# Altium PCB PCB_6位IN12-辉光管时钟_2_2024-12-10.pcbdoc (part 1 of 2)
Units mm, origin at the board's own origin, x right, y up, seen from the top; angles counter-clockwise.
Board outline 250.51 x 113.84 mm, 2 copper layers (Top Layer, Bottom Layer); 109 components, 183 nets, 545 pads, 291 vias.
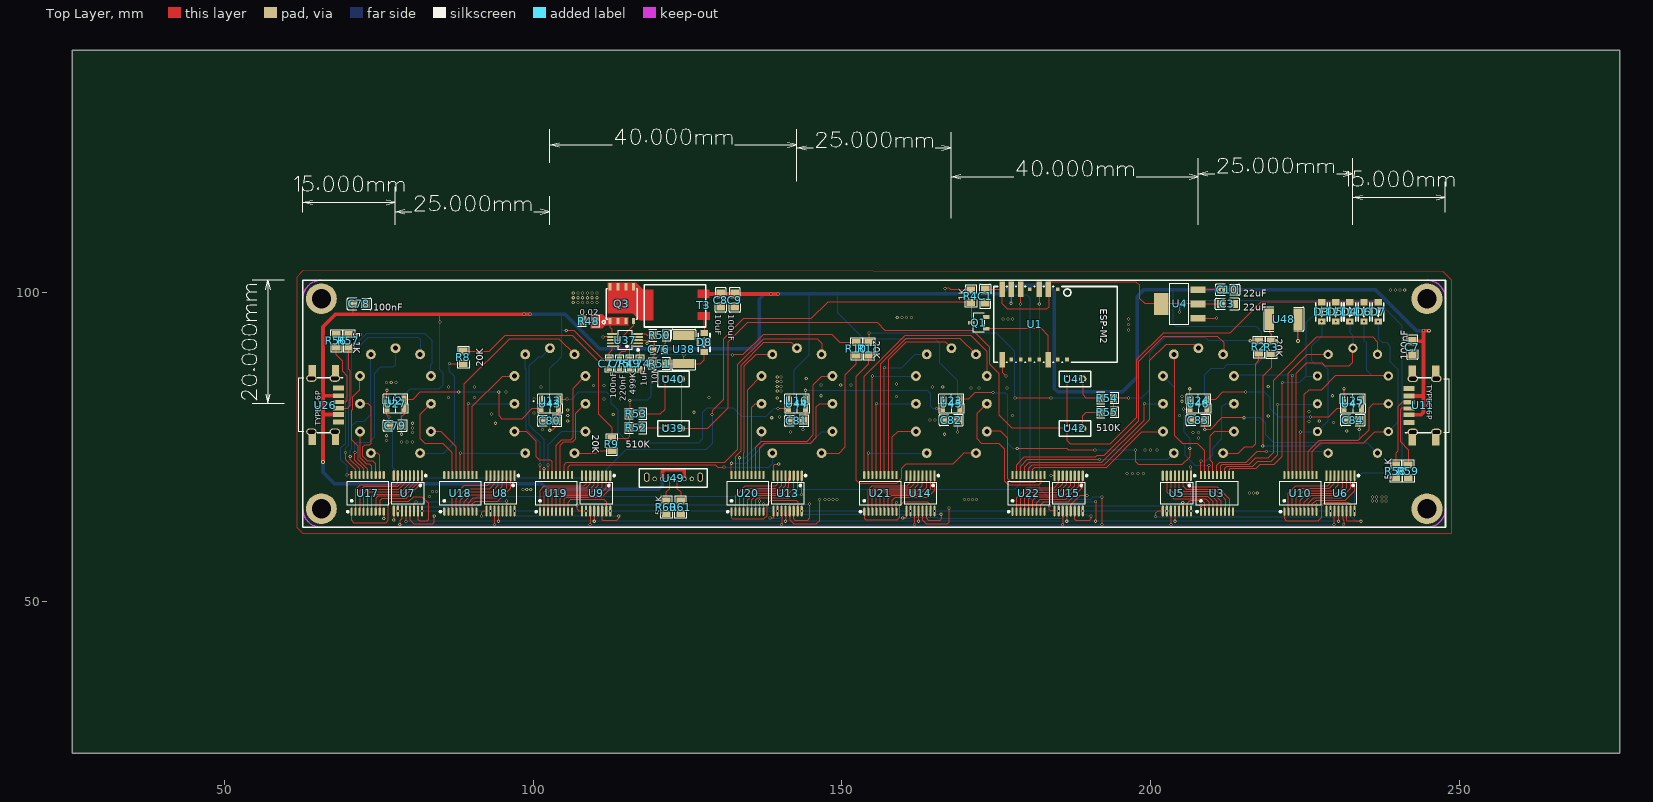
[diagram p0: Top Layer view]
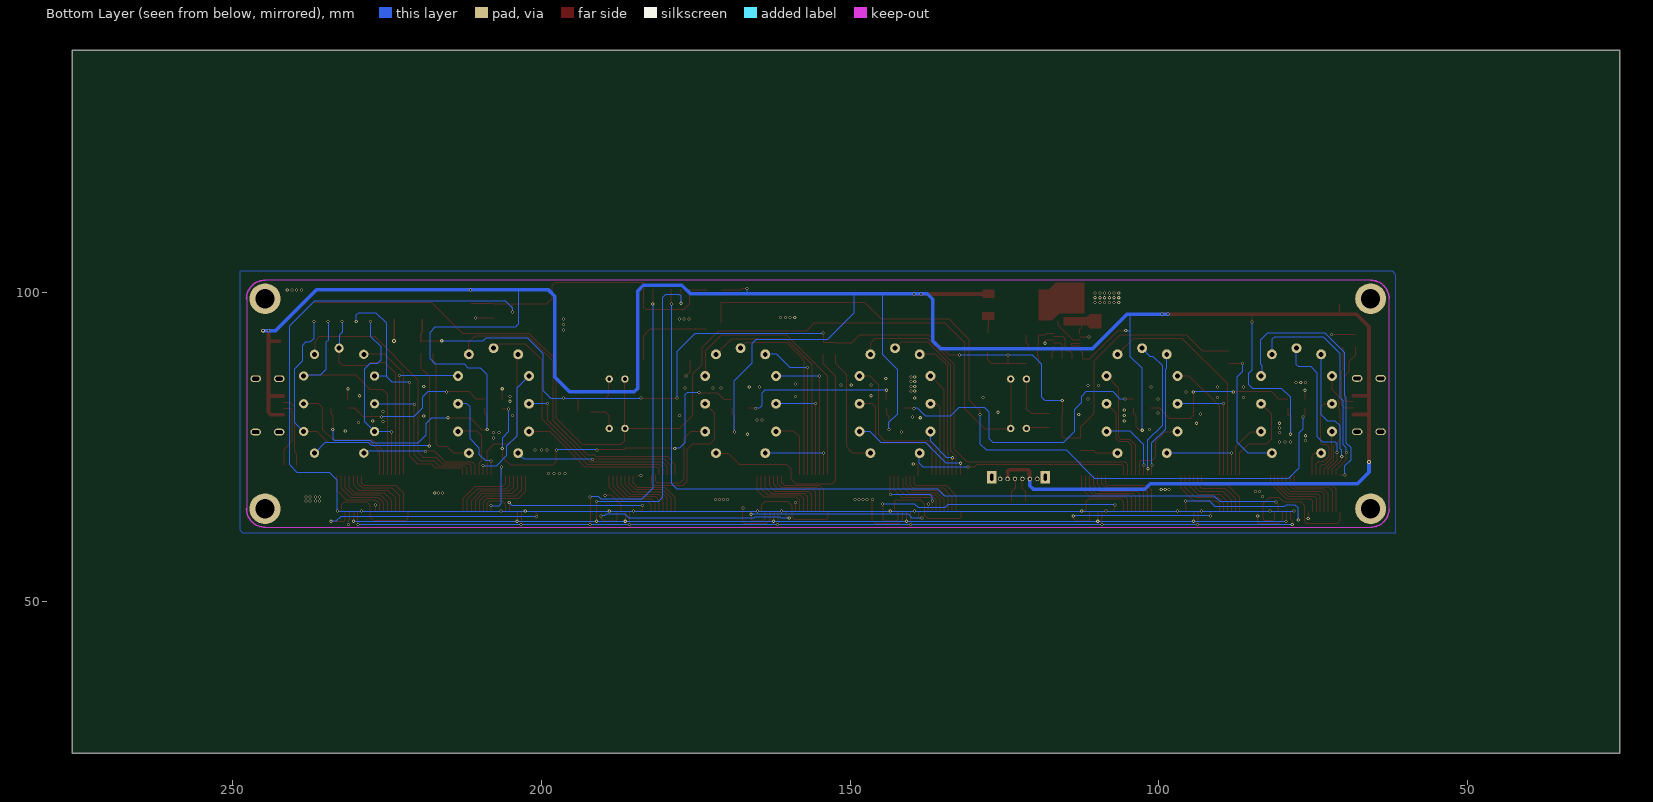
[diagram p1: Bottom Layer view, seen from below]

## Layer stack, top to bottom
Top Layer: signal copper (thickness not stored)
Dielectric: dielectric 0.32, FR-4, Dk 4.8
Bottom Layer: signal copper (thickness not stored)

## Board outline
275.912,25.4 25.4,25.4 25.4,139.235 275.912,139.235

## Components (designator, comment, footprint, x,y, rotation, side; value= is the part's Value field where it differs from the comment)
C1 "100nF" C0805 173.175,99.439 r270 top
C3 "22uF" C0805 212.418,98.169 r0 top
C7 "100nF" C0805 242.358,91.153 r90 top
C8 "10uF" C0805 130.376,98.804 r90 top
C9 "100uF" C0805 132.662,98.804 r90 top
C10 "22uF" C0805 212.418,100.455 r180 top
C74 "1uF" R0603 117.295,88.517 r90 top
C75 "220nF" R0603 113.993,88.517 r90 top
C76 "10nF" R0603 120.343,90.803 r180 top
C77 "100nF" R0603 112.342,88.517 r90 top
C78 "100nF" C0805 71.829,98.169 r180 top
C79 "100nF" C0805 77.671,78.484 r0 top
C80 "100nF" C0805 102.69,79.246 r0 top
C81 "100nF" C0805 142.695,79.246 r0 top
C82 "100nF" C0805 167.714,79.373 r0 top
C83 "100nF" C0805 207.719,79.373 r0 top
C84 "100nF" C0805 232.738,79.373 r0 top
D3 "ES1JW" SOD-123F_L2.8-W1.8-LS3.7-RD 227.658,96.899 r270 top
D4 "ES1JW" SOD-123F_L2.8-W1.8-LS3.7-RD 232.23,96.899 r270 top
D5 "ES1JW" SOD-123F_L2.8-W1.8-LS3.7-RD 229.944,96.899 r270 top
D6 "ES1JW" SOD-123F_L2.8-W1.8-LS3.7-RD 234.516,96.899 r270 top
D7 "ES1JW" SOD-123F_L2.8-W1.8-LS3.7-RD 236.802,96.899 r270 top
D8 "ES1JW" SOD-123F_L2.8-W1.8-LS3.7-RD 127.709,91.946 r270 top
Q1 "WSTBSS138" SOT-23-3_L2.9-W1.6-P1.90-LS2.8-BR 172.159,95.121 r0 top
Q3 "TPH1R403NL" DSOP-8_L5.0-W5.0-P1.27-LS6.0-BL-EP 114.374,98.169 r0 top
R2 "20K" R0805#1 217.498,91.218 r270 top
R3 "20K" R0805#1 219.53,91.184 r270 top
R4 "1K" R0805#1 170.889,99.439 r90 top
R8 "20K" R0805#1 88.716,89.52 r90 top
R9 "20K" R0805#1 112.723,75.436 r270 top
R10 "20K" R0805#1 152.347,90.93 r270 top
R11 "20K" R0805#1 154.379,90.93 r270 top
R48 "0.02" R0805#2 109.04,95.375 r0 top
R49 "499K" R0603 115.644,88.517 r90 top
R50 "75K" R0805#2 120.47,93.089 r180 top
R51 "10M" R0805#1 120.47,88.517 r0 top
R52 "510K" R0805#1 116.66,78.103 r0 top
R53 "510K" R0805#1 116.66,80.389 r0 top
R54 "510K" R0805#1 192.987,82.929 r180 top
R55 "510K" R0805#1 192.987,80.643 r180 top
R56 "18k" R0805#1 68.146,92.2 r270 top
R57 "5.1K" R0805#1 70.178,92.2 r270 top
R58 "18k" R0805#1 239.691,71.087 r90 top
R59 "5.1K" R0805#1 241.723,71.087 r90 top
R60 "5.1K" R0805#1 121.581,65.245 r90 top
R61 "18k" R0805#1 123.867,65.245 r90 top
T3 "TTRN-060-054" TTRN-060-054 122.883,97.915 r90 top
U1 "ESP-M2" WIFIMODULE-ESP-M2 181.176,94.867 r270 top
U2 "in12" IN12#1 77.716,82.02 r0 top
U3 "TD62083AFNG" SSOP-18_L6.8-W4.4-P0.65-LS6.4-BL 210.716,67.521 r0 top
U4 "AMS1117" SOT-223-3_L6.5-W3.4-P2.30-LS7.0-BR 204.671,98.169 r0 top
U5 "74HCT595PW,112" TSSOP-16_L5.0-W4.4-P0.65-LS6.4-BL 204.216,67.521 r180 top
U6 "74HCT595PW,112" TSSOP-16_L5.0-W4.4-P0.65-LS6.4-BL 230.716,67.521 r180 top
U7 "74HCT595PW,112" TSSOP-16_L5.0-W4.4-P0.65-LS6.4-BL 79.716,67.522 r180 top
U8 "74HCT595PW,112" TSSOP-16_L5.0-W4.4-P0.65-LS6.4-BL 94.716,67.521 r180 top
U9 "74HCT595PW,112" TSSOP-16_L5.0-W4.4-P0.65-LS6.4-BL 110.216,67.521 r180 top
U10 "TD62083AFNG" SSOP-18_L6.8-W4.4-P0.65-LS6.4-BL 224.216,67.521 r0 top
U11 "TYPEC 6P" "TYPEC 6P" 244.216,81.52 r270 top
U12 "in12" IN12#1 102.716,82.02 r0 top
U13 "74HCT595PW,112" TSSOP-16_L5.0-W4.4-P0.65-LS6.4-BL 141.216,67.521 r180 top
U14 "74HCT595PW,112" TSSOP-16_L5.0-W4.4-P0.65-LS6.4-BL 162.716,67.521 r180 top
U15 "74HCT595PW,112" TSSOP-16_L5.0-W4.4-P0.65-LS6.4-BL 186.716,67.521 r180 top
U16 "in12" IN12#1 142.716,82.02 r0 top
U17 "TD62083AFNG" SSOP-18_L6.8-W4.4-P0.65-LS6.4-BL 73.216,67.522 r0 top
U18 "TD62083AFNG" SSOP-18_L6.8-W4.4-P0.65-LS6.4-BL 88.216,67.521 r0 top
U19 "TD62083AFNG" SSOP-18_L6.8-W4.4-P0.65-LS6.4-BL 103.716,67.521 r0 top
U20 "TD62083AFNG" SSOP-18_L6.8-W4.4-P0.65-LS6.4-BL 134.716,67.521 r0 top
U21 "TD62083AFNG" SSOP-18_L6.8-W4.4-P0.65-LS6.4-BL 156.216,67.521 r0 top
U22 "TD62083AFNG" SSOP-18_L6.8-W4.4-P0.65-LS6.4-BL 180.216,67.521 r0 top
U23 "in12" IN12#1 167.716,82.02 r0 top
U24 "in12" IN12#1 207.716,82.02 r0 top
U25 "in12" IN12#2 232.716,82.02 r0 top
U26 "TYPEC 6P" "TYPEC 6P" 66.114,82.04 r90 top
U27 "WS2812--1209" WS2812--1209 77.716,82.02 r180 top
U37 "MAX668EUB+" MSOP-10_L3.0-W3.0-P0.50-LS5.0-BL 114.882,92.327 r90 top
U38 "1uf" C1812 124.407,90.803 r270 top
U39 "HDR-TH_2P-P2.54_C9900022687" HDR-TH_2P-P2.54_C9900022687 122.716,78.02 r0 top
U40 "HDR-TH_2P-P2.54_C9900022687" HDR-TH_2P-P2.54_C9900022687 122.716,86.02 r0 top
U41 "HDR-TH_2P-P2.54_C9900022687" HDR-TH_2P-P2.54_C9900022687 187.716,86.02 r0 top
U42 "HDR-TH_2P-P2.54_C9900022687" HDR-TH_2P-P2.54_C9900022687 187.716,78.02 r0 top
U43 "WS2812--1209" WS2812--1209 102.716,82.02 r180 top
U44 "WS2812--1209" WS2812--1209 142.716,82.02 r180 top
U45 "WS2812--1209" WS2812--1209 167.716,82.02 r180 top
U46 "WS2812--1209" WS2812--1209 207.716,82.02 r180 top
U47 "WS2812--1209" WS2812--1209 232.716,82.02 r180 top
U48 "1uf" C1812 221.53,95.725 r180 top
U49 "TYPEC6PIN" TYPEC6PIN 122.716,69.992 r180 top
? "" ? 240.216,116.326 r0 top
? "" ? 220.216,116.412 r0 top
? "" ? 187.716,116.677 r0 top
? "" ? 155.216,122.014 r0 top
? "" ? 122.716,123.752 r0 top
? "" ? 90.216,113.342 r0 top
? "" ? 70.216,115.921 r0 top
? "" ? 56.284,92.02 r0 top
? "" ? 246.215,107.971 r0 top
? "" ? 64.217,107.628 r0 top
? "" ? 177.716,112.62 r0 top
? "" ? 256.438,92.02 r0 top
? "" ? 112.716,112.834 r0 top
? "" ? 55.981,80.932 r0 top
? "" ? 152.716,106.293 r0 top
? "" ? 64.216,53.382 r0 top
? "" ? 56.589,63.522 r0 top
? "" ? 92.716,41.586 r0 top
? "" ? 41.933,66.021 r0 top
? "" ? 48.951,82.022 r0 top
? "" ? 48.971,94.023 r0 top
? "" ? 155.215,49.544 r0 top

## Footprints (in the part's own frame and the unit in brackets; to place one, negate y for a bottom-side part, rotate by r counter-clockwise, add the part's x,y. Pads: shape width x height; smd on the part's side, far side on the other; paste and mask are expansions set on the pad)
C0805 [mm]
  rect 1.41x1.35 smd paste-100 mask+0.051: 1(-1,0) 2(1,0)
  silkscreen extent -1.96,-0.9 1.96,0.9
C1812 [mm]
  rect 1.485x3.456 smd paste-100 mask+0.051: 1(-2.293,0) 2(2.293,0)
  silkscreen extent -3.26,-1.96 3.26,1.96
DSOP-8_L5.0-W5.0-P1.27-LS6.0-BL-EP [mm]
  rect 0.5x1 smd paste-100 mask+0.05: 1(-1.906,-2.77) 2(-0.636,-2.77) 3(0.634,-2.77) 4(1.904,-2.77)
  rect 0.5x1.2 smd paste-100 mask+0.05: 5(1.906,2.77) 6(0.636,2.77) 7(-0.634,2.77) 8(-1.904,2.77)
  Top Layer region: -2.125,2.2 2.125,2.2 2.125,-1.3 -2.125,-1.3
  silkscreen extent -3.17,-3.17 2.5,2.5
HDR-TH_2P-P2.54_C9900022687 [mm]
  round 1.2 hole 0.6 paste+0 mask+0.05: 1(-1.27,0) 2(1.27,0)
  silkscreen extent -2.54,-1.27 2.54,1.27
IN12#1 [mm]
  round 1.6 hole 0.8 paste+0 mask+0.102: 1(3.988,-8.001) 2(5.74,-4.496) 3(5.74,0) 4(5.74,4.496) 5(3.988,8.001) 6(0,8.992) 7(-3.988,8.001) 8(-5.74,4.496) 9(-5.74,0) 10(-5.74,-4.496) 11(-3.988,-8.001)
IN12#2 [mm]
  round 1.5 hole 0.8 paste+0 mask+0.102: 1(3.988,-8.001) 2(5.74,-4.496) 3(5.74,0) 4(5.74,4.496) 5(3.988,8.001) 6(0,8.992) 7(-3.988,8.001) 8(-5.74,4.496) 9(-5.74,0) 10(-5.74,-4.496) 11(-3.988,-8.001)
MSOP-10_L3.0-W3.0-P0.50-LS5.0-BL [mm]
  oval 0.28x1.62 smd paste+0 mask+0.051: 1(-1,-2.11) 2(-0.5,-2.11) 3(0,-2.11) 4(0.5,-2.11) 5(1,-2.11) 6(1,2.11) 7(0.5,2.11) 8(0,2.11) 9(-0.5,2.11) 10(-1,2.11)
  silkscreen extent -1.74,-2.26 1.58,1.07
R0603 [mm]
  rect 0.806x0.864 smd paste-100 mask+0.051: 1(-0.753,0) 2(0.753,0)
  silkscreen extent -1.39,-0.66 1.39,0.66
R0805#1 [mm]
  rect 1.133x1.377 smd paste-100 mask+0.051: 1(-1,0) 2(1,0)
  silkscreen extent -1.76,-0.92 1.76,0.92
R0805#2 [mm]
  rect 1.133x1.377 smd paste-100 mask+0.051: 1(-0.966,0) 2(0.966,0)
  silkscreen extent -1.76,-0.92 1.76,0.92
SOD-123F_L2.8-W1.8-LS3.7-RD [mm]
  rect 1x1.2 smd paste+0 mask+0.051: 1(1.55,0) 2(-1.55,0)
  silkscreen extent -1.49,-0.95 1.52,0.93
SOT-23-3_L2.9-W1.6-P1.90-LS2.8-BR [mm]
  rect 1.07x0.6 smd paste+0 mask+0.051: 1(1.235,-0.95) 2(1.235,0.95) 3(-1.235,0)
  silkscreen extent -0.88,-1.54 0.88,1.54
SOT-223-3_L6.5-W3.4-P2.30-LS7.0-BR [mm]
  rect 2.5x1.1 smd paste+0 mask+0.051: 1(2.97,-2.3) 2(2.97,0) 3(2.97,2.3)
  rect 2.34x3.6 smd paste+0 mask+0.051: 4(-2.97,0)
  silkscreen extent -1.57,-3.33 1.37,3.33
SSOP-18_L6.8-W4.4-P0.65-LS6.4-BL [mm]
  oval 0.336x1.338 smd paste+0 mask+0.051: 1(-2.6,-2.969) 2(-1.95,-2.969) 3(-1.3,-2.969) 4(-0.65,-2.969) 5(0,-2.969) 6(0.65,-2.969) 7(1.3,-2.969) 8(1.95,-2.969) 9(2.6,-2.969) 10(2.6,2.969) 11(1.95,2.969) 12(1.3,2.969) 13(0.65,2.969) 14(0,2.969) 15(-0.65,2.969) 16(-1.3,2.969) 17(-1.95,2.969) 18(-2.6,2.969)
  silkscreen extent -3.37,-3.12 3.33,1.97
TSSOP-16_L5.0-W4.4-P0.65-LS6.4-BL [mm]
  oval 0.343x1.731 smd paste+0 mask+0.051: 1(-2.275,-2.866) 2(-1.625,-2.866) 3(-0.975,-2.866) 4(-0.325,-2.866) 5(0.325,-2.866) 6(0.975,-2.866) 7(1.625,-2.866) 8(2.275,-2.866) 9(2.275,2.866) 10(1.625,2.866) 11(0.975,2.866) 12(0.325,2.866) 13(-0.325,2.866) 14(-0.975,2.866) 15(-1.625,2.866) 16(-2.275,2.866)
  silkscreen extent -3.05,-3.02 2.58,1.77
TTRN-060-054 [mm]
  round 0.2 smd paste+0 mask+0.051: NC(0.052,-4.761)
  Top Layer region: -2.322,5.462 -1.052,5.462 -1.052,3.557 -2.322,3.557
  Top Layer region: 1.107,5.462 2.377,5.462 2.377,3.557 1.107,3.557
  Top Layer region: -2.322,-3.809 -1.052,-3.809 -1.052,-5.714 -2.322,-5.714
  Top Layer region: 1.27,-3.746 2.54,-3.746 2.54,-5.651 1.27,-5.651
  silkscreen extent -3.46,-5.08 3.39,4.92
TYPEC6PIN [mm]
  round 0.7 hole 0.5 paste+0 mask+0.051: 1(-2.975,0.135) 2(-1.775,0.135) 3(-0.575,0.135) 4(0.625,0.135) 5(1.825,0.135) 6(3.025,0.135)
  oval 0.9x1.5 hole 0.5 slot 1.1 at 90 deg paste+0 mask+0.1: 9(-4.325,-0.135)
  oval 0.9x1.5 hole 0.5 slot 1.1 at 90 deg paste+0 mask+0.051: 9(4.325,-0.135)
"TYPEC 6P" [mm]
  rect 2x1.2 smd paste+0 mask+0.051: 1(-5.715,-1.895) 1(-5.715,1.905) 1(5.225,-1.895) 1(5.225,1.905)
  rect 0.7x1.778 smd paste+0 mask+0.102: A5(0.267,-2.413) B5(-0.733,-2.413)
  rect 0.76x1.778 smd paste+0 mask+0.102: A9(-1.753,-2.413) B9(1.287,-2.413)
  rect 0.8x1.778 smd paste+0 mask+0.102: A12(-2.983,-2.413) B12(2.517,-2.413)
  oval 1.1x1.7 hole 0.6 slot 1.2 at 90 deg paste+0 mask+0.102: B12(-4.551,2.011) B12(-4.551,-1.789) B12(4.089,2.011) B12(4.089,-1.789)
  silkscreen extent -4.73,-3.05 4.21,4.11
WIFIMODULE-ESP-M2 [mm]
  rect 0.6x0.6 smd paste+0 mask+0.05: 1(-5.7,3.75) 4(-5.7,-0.75) 9(5.7,-3.75) 10(5.7,-2.25) 11(5.7,-0.75) 12(5.7,0.75) 14(5.7,3.75) 15(5.7,5.25)
  rect 2.5x0.9 smd paste+0 mask+0.05: 2(-5.7,2.25) 3(-5.7,0.75) 5(-5.7,-2.25) 6(-5.7,-3.75) 7(-5.7,-5.25) 8(5.7,-5.25) 13(5.7,2.25)
  silkscreen extent -6.16,-6.6 6.16,13.4
WS2812--1209 [mm]
  rect 0.8x1.2 smd paste+0: 1(1.4,0.75) 2(-1.4,0.75) 3(-1.4,-0.75) 4(1.4,-0.75)
  silkscreen extent -2,-1.5 2,1.5
? [mm]
  silkscreen extent -8.84,-3.31 8.84,3.31

## Free pads (board coordinates)
  round 5 hole 3.1 paste+0: 1(65.716,99.02) 2(65.716,65.021) 3(244.716,65.021) 4(244.716,99.02)
  rect 1.524x2 smd far side paste+0.102 mask+0.051: 5(118.391,70.127) 6(127.041,70.127)

## Via types
v1: diameter 0.5, hole 0.31, Top Layer to Bottom Layer, tented both sides, 288 vias
v2: diameter 0.62, hole 0.31, Top Layer to Bottom Layer, tented both sides, 3 vias

## Nets (pads, with @x,y where several pads share a name; then routed paths per layer and width w, separated by ;. In a path a pad name is that pad's centre, name@x,y a point inside that pad or via, vN(x,y) a via of type N, cw(c..) or ccw(c..) an arc to the next point about the centre after c; other vN are vias at no path point)
233: 
2333: 
+3.3V: C1.1 C3.1 U1.2 U1.7 U4.2 U4.4 U5.10 U5.16 U6.10 U6.16 U7.10 U7.16 U8.10 U8.16 U9.10 U9.16 U13.10 U13.16 U14.10 U14.16 U15.10 U15.16 | length 279.3
  Top Layer w0.15: C1.1@173.175,100.439 175.798,100.439 U1.7@175.926,100.567 ; U1.7@175.926,100.567 175.926,98.212 176.858,97.28 183.081,97.28 183.462,97.661 183.462,100.439 U1.2@183.426,100.567 183.427,101.689 183.462,101.725 197.686,101.725 198.194,101.217 198.194,99.058 199.083,98.169 U4.4@201.701,98.169 U4.2@207.641,98.169 C3.1@211.418,98.169 ; v1(204.671,96.899) 204.671,98.169
  Bottom Layer w0.15: v1(78.09,64.655) v1(81.991,64.655) v1(232.991,64.655) ; v1(204.671,96.899) 204.671,97.534 205.814,98.677 236.675,98.677 240.739,94.613 240.739,72.134 239.469,70.864 234.262,70.864 232.992,69.594 v1(232.991,64.655)
  other v1: 93.091,64.655 96.991,64.655 108.591,64.655 112.491,64.655 139.591,64.655 143.491,64.655 161.091,64.655 164.991,64.655 185.091,64.655 188.991,64.655 202.591,64.655 206.491,64.655 229.091,64.655
+5V: C7.2 C8.2 C9.2 C10.2 C77.2 C78.2 C79.2 C80.2 C81.2 C82.2 C83.2 C84.2 R4.2 U4.3 U11.A9 U11.B9 U26.A9 U26.B9 U27.2 U37.9 U37.10 U43.2 U44.2 U45.2 U46.2 U47.2 U49.2 U49.5 | length 582.9
  Top Layer w0.15: 70.829,96.518 C78.2@70.829,98.169 ; v1(78.687,77.087) 78.687,79.881 79.116,80.31 U27.2@79.116,81.27 ; v1(84.91,95.248) 84.91,96.518 ; v1(102.69,77.722) 103.071,77.722 103.706,78.357 103.706,80.135 104.115,80.544 U43.2@104.115,81.27 ; v1(105.357,93.851) 106.627,93.851 111.208,89.27 C77.2@112.342,89.27 112.342,90.295 112.772,90.725 U37.10@112.772,91.327 114.12,91.327 114.12,91.827 U37.9@112.772,91.827 ; v1(143.711,77.849) 143.711,80.008 144.115,80.411 U44.2@144.115,81.27 ; v1(166.698,100.709) 167.333,100.709 167.603,100.439 R4.2@170.889,100.439 ; v1(168.73,77.468) C82.2@168.714,79.373 168.715,80.119 169.116,80.521 U45.2@169.116,81.27 ; U4.3@207.64,100.467 v1(211.417,100.455) ; U46.2@209.116,81.27 209.116,80.516 208.735,80.135 v1(208.735,77.849) 209.624,77.849 211.529,79.754 v1(215.085,79.754) ; v1(233.754,77.849) 233.754,80.135 234.115,80.495 U47.2@234.115,81.27
  Top Layer w0.6: 65.987,83.328 U26.B9@68.527,83.326 ; v2(65.988,72.611) 65.988,80.622 ; U26.A9@68.527,80.286 65.988,80.287 65.988,94.485 68.02,96.517 v1(99.515,96.518) ; U49.5@120.891,69.857 120.946,69.912 120.946,71.087 121.2,71.341 124.248,71.341 124.491,71.097 U49.2@124.491,69.857 ; 127.582,99.82 127.598,99.804 C8.2@130.376,99.804 C9.2@132.662,99.804 v1(138.504,99.804) v1(139.647,99.804) ; U11.B9@241.802,80.234 243.758,80.232 244.168,80.643 v1(244.168,93.851) v2(245.025,93.851) ; U11.A9@241.802,83.272 244.062,83.272 244.168,83.378 ; C7.2@242.358,92.153 244.168,92.153
  Bottom Layer w0.15: v1(78.687,77.087) 78.687,83.056 80.084,84.453 84.783,84.453 85.418,85.088 85.418,86.993 84.91,87.501 v1(84.91,95.248) ; v1(102.69,77.722) 102.69,87.755 104.595,89.66 104.595,96.518 ; 104.595,93.851 v1(105.357,93.851) ; v1(143.711,77.849) 143.711,78.992 142.314,80.389 142.314,87.501 144.727,89.914 144.727,99.82 ; 152.728,99.82 149.299,99.82 149.299,96.772 153.617,92.454 165.174,92.454 165.809,91.819 165.809,88.644 168.73,85.723 v1(168.73,77.468) ; 166.698,99.82 v1(166.698,100.709) ; 203.655,100.455 203.655,94.994 204.163,94.486 217.117,94.486 218.006,93.597 218.006,89.279 217.117,88.39 212.418,88.39 211.783,87.755 209.751,87.755 208.735,86.739 v1(208.735,77.849) ; v1(215.085,79.754) 217.752,79.754 218.641,78.865 218.641,76.96 219.911,75.69 227.277,75.69 227.658,76.071 233.5,76.071 233.754,76.325 v1(233.754,77.849)
  Bottom Layer w0.6: v2(65.988,72.611) 65.988,70.927 67.86,69.055 101.388,69.055 102.277,68.166 120.311,68.166 120.89,68.745 U49.5@120.89,69.857 ; v1(98.499,96.518) v1(99.515,96.518) ; v1(99.515,96.518) 105.167,96.517 110.755,90.929 135.33,90.929 136.6,92.199 136.6,98.93 137.489,99.819 175.843,99.819 177.24,101.216 183.463,101.216 184.352,100.327 184.352,84.516 184.923,83.944 195.401,83.944 197.814,86.357 197.814,99.441 198.827,100.454 236.422,100.454 243.026,93.85 v1(244.168,93.851) ; v1(244.168,93.851) v2(245.025,93.851)
C6_2: C74.2 U37.1 | length 2.2
  Top Layer w0.15: U37.1@116.992,91.327 116.992,90.598 117.295,90.295 C74.2@117.295,89.27
C7_2: C75.2 U37.4 | length 6
  Top Layer w0.15: C75.2@113.993,89.27 113.993,90.168 114.374,90.549 114.882,90.549 115.136,90.803 115.136,92.454 115.509,92.827 U37.4@116.992,92.827
DATA: U1.5 U7.14 | length 132.2
  Top Layer w0.15: U7.14@80.691,64.656 80.691,65.757 v1(81.068,66.134) ; v1(178.89,98.169) 178.926,98.205 U1.5@178.926,100.567
  Bottom Layer w0.15: v1(81.068,66.134) 90.086,66.134 91.006,67.054 134.694,67.054 135.837,68.197 178.001,68.197 178.89,69.086 v1(178.89,98.169)
DATA2: U7.9 U8.14 | length 24
  Top Layer w0.15: v1(77.441,63.213) U7.9@77.441,64.656 ; U8.14@95.69,64.656 v1(95.705,66.292)
  Bottom Layer w0.15: v1(77.441,63.213) 77.441,65.174 77.893,65.626 79.417,65.626 79.671,65.372 90.847,65.372 91.736,66.261 95.674,66.261 v1(95.705,66.292)
DATA3: U8.9 U9.14 | length 28.3
  Top Layer w0.15: v1(91.641,63.879) 91.641,64.387 91.909,64.655 U8.9@92.441,64.655 ; U9.14@111.191,64.655 111.191,63.252 111.326,63.117 113.485,63.117 113.866,63.498 v1(113.866,63.879)
  Bottom Layer w0.15: v1(91.641,63.879) v1(113.866,63.879)
DATA4: U9.9 U13.14 | length 46
  Top Layer w0.15: v1(107.135,65.657) 107.135,65.022 107.502,64.655 U9.9@107.941,64.655 ; U13.14@142.191,64.655 142.192,63.376 142.441,63.117 144.346,63.117 144.727,63.498 v1(144.727,65.784)
  Bottom Layer w0.15: v1(107.135,65.657) 134.186,65.657 134.694,65.149 138.885,65.149 139.52,65.784 v1(144.727,65.784)
DATA5: U13.9 U14.14 | length 34.1
  Top Layer w0.15: v1(138.377,63.498) 138.758,63.498 138.941,63.68 U13.9@138.941,64.655 ; U14.14@163.691,64.655 163.691,63.457 164.031,63.117 165.809,63.117 166.063,63.371 v1(166.063,64.133)
  Bottom Layer w0.15: v1(138.377,63.498) 139.901,63.498 140.536,64.133 v1(166.063,64.133)
DATA6: U14.9 U15.14 | length 37.2
  Top Layer w0.15: v1(159.84,63.498) 160.221,63.498 160.442,63.716 U14.9@160.441,64.655 ; U15.14@187.691,64.655 187.691,63.333 187.907,63.117 190.066,63.117 190.32,63.371 v1(190.32,63.879)
  Bottom Layer w0.15: v1(159.84,63.498) 161.11,63.498 161.237,63.625 165.428,63.625 165.555,63.498 185.748,63.498 186.383,64.133 189.558,64.133 189.812,63.879 v1(190.32,63.879)
DATA7: U5.14 U15.9 | length 24.8
  Top Layer w0.15: v1(183.589,65.53) 183.589,64.895 183.828,64.656 U15.9@184.44,64.656 ; v1(205.179,66.038) U5.14@205.191,64.655
  Bottom Layer w0.15: v1(183.589,65.53) 204.671,65.53 v1(205.179,66.038)
DATA8: U5.9 U6.14 | length 39.4
  Top Layer w0.15: v1(200.734,63.752) 200.734,64.26 201.129,64.655 U5.9@201.941,64.655 ; U6.14@231.691,64.655 231.691,63.148 231.849,62.99 v1(234.008,62.99)
  Bottom Layer w0.15: v1(200.734,63.752) 232.484,63.752 233.246,62.99 v1(234.008,62.99)
GND: C1.2 C3.2 C7.1 C8.1 C9.1 C10.1 C74.1 C75.1 C76.1 C77.1 C78.1 C79.1 C80.1 C81.1 C82.1 C83.1 C84.1 pad.1 pad.2 pad.3 pad.4 pad.5 pad.6 Q1.2 R48.1 R49.1 R50.1 R56.1 R57.1 R58.1 R59.1 R60.1 R61.1 U1.8 U3.9 U4.1 U5.8 U5.13 U6.8 U6.13 U7.8 U7.13 U8.8 U8.13 U9.8 U9.13 U10.9 U11.1 U11.A12 U11.B12 U13.8 U13.13 U14.8 U14.13 U15.8 U15.13 U17.9 U18.9 U19.9 U20.9 U21.9 U22.9 U26.1 U26.A12 U26.B12 U27.4 U37.3 U37.7 U38.1 U43.4 U44.4 U45.4 U46.4 U47.4 U48.1 U49.1 U49.6 U49.9 | length 63.9
  Top Layer w0.15: R56.1@68.146,93.2 R57.1@70.178,93.2 v1(72.083,93.2) ; v1(75.816,63.467) U17.9@75.816,64.553 ; U27.4@76.316,82.77 v1(76.316,84.199) ; U7.13@80.041,64.656 80.041,63.224 80.687,62.578 83.735,62.578 83.989,62.832 v1(83.989,63.848) ; v1(111.326,92.827) U37.7@112.772,92.827 ; U37.3@116.992,92.327 118.311,92.327 118.438,92.2 v1(118.438,91.819) ; C76.1@121.096,90.803 121.096,91.529 121.436,91.868 R50.1@121.436,93.089 ; U20.9@137.316,64.552 v1(137.316,65.784) ; U13.8@138.941,70.386 138.941,72.062 139.139,72.261 v1(139.774,72.261) ; U13.13@141.541,64.655 141.541,63.255 142.187,62.609 145.87,62.609 146.378,63.117 v1(146.378,66.546) ; U21.9@158.816,64.552 v1(158.816,66.038) ; U14.13@163.041,64.655 163.041,63.218 163.65,62.609 167.079,62.609 167.333,62.863 v1(167.333,65.149) ; U1.8@175.926,89.167 175.926,87.119 v1(176.561,86.485) ; v1(183.843,70.386) U15.8@184.441,70.386 ; U15.13@187.041,64.655 187.041,65.679 188.543,67.18 v1(189.685,67.181) ; U46.4@206.316,82.77 v1(206.316,84.453) ; U4.1@207.641,95.869 v1(210.64,95.869) ; U10.9@226.816,64.552 v1(226.816,65.657) ; U6.13@231.041,64.655 231.041,63.29 231.214,63.117 v1(231.214,62.482) ; U47.4@231.316,82.77 v1(231.316,84.453)
  Top Layer w0.254: v2(223.822,92.169) U48.1@223.822,95.725
  other v1: 235.913,66.292 236.548,66.292 237.437,66.292 238.072,66.292 147.267,66.546 147.902,66.546 148.537,66.546 149.172,66.546 169.873,66.546 170.508,66.546 171.143,66.546 171.778,66.546 235.913,66.927 236.548,66.927 237.437,66.927 238.072,66.927 83.227,67.023 215.974,67.562 216.609,67.562 217.244,67.562 83.735,67.785 84.37,67.785 98.34,68.166 98.975,68.166 99.61,68.166 196.162,70.737 197.051,70.737 197.94,70.737 198.829,70.737 199.083,74.547 199.972,74.547 200.988,74.547 78.687,75.817 79.576,75.817 80.465,75.817 76.274,76.071 207.719,76.452 76.274,76.833 166.571,77.087 80.465,77.341 206.83,77.341 207.719,77.341 141.679,77.468 231.722,77.595 101.547,77.849 80.465,78.103 80.465,78.865 93.927,78.865 229.563,78.992 225.626,79.119 105.611,79.246 227.277,79.246 164.285,79.373 165.047,79.373 138.631,79.754 139.901,79.881 219.022,80.008 105.611,80.135 177.62,80.135 204.671,80.135 112.977,80.262 93.292,80.389 100.15,80.516 126.058,80.643 225.626,80.77 105.611,81.024 205.052,82.421 100.15,82.802 111.453,82.802 139.52,82.929 86.307,83.056 90.498,83.056 128.471,83.056 158.824,83.183 205.052,83.183 146.632,83.31 229.436,83.31 95.578,83.945 139.52,84.072 140.155,84.072 170.889,84.58 172.159,84.58 176.731,84.58 86.307,84.707 90.498,84.707 101.293,84.707 164.666,84.707 166.317,84.707 139.52,84.834 140.155,84.834 219.022,84.834 109.802,84.961 111.453,84.961 146.632,85.088 149.807,85.088 151.458,85.088 158.824,85.215 76.274,85.469 77.036,85.469 77.798,85.469 139.52,85.596 140.155,85.596 144.219,86.104 139.52,86.358 140.155,86.358 196.416,93.978 196.416,94.867 176.096,95.756 176.858,95.756 177.62,95.756 196.416,95.756 158.951,96.01 159.713,96.01 160.475,96.01 161.237,96.01 106.5,98.423 107.262,98.423 108.024,98.423 108.786,98.423 109.548,98.423 110.31,98.423 106.5,99.185 107.262,99.185 108.024,99.185 108.786,99.185 109.548,99.185 110.31,99.185 106.5,99.947 107.262,99.947 108.024,99.947 108.786,99.947 109.548,99.947 110.31,99.947 238.834,100.455 239.596,100.455 240.358,100.455 240.358,100.455 241.12,100.455
GND1: D3.2 D4.2 D5.2 D6.2 D7.2 U39.2 U40.2 U41.1 U42.1 | length 172.1
  Top Layer w0.15: U39.2@123.986,78.02 124.031,77.976 128.217,77.976 131.519,81.278 131.519,91.946 134.694,95.121 155.776,95.121 157.046,93.851 171.27,93.851 173.937,91.184 173.937,88.39 175.461,86.866 175.461,80.135 177.574,78.021 U42.1@186.446,78.02 ; U39.2@123.986,78.02 U40.2@123.986,86.02 ; U42.1@186.446,78.02 U41.1@186.446,86.02 ; U42.1@186.446,78.02 186.447,76.007 187.019,75.435 193.369,75.435 197.687,79.753 197.687,89.151 202.005,93.469 212.797,93.469 217.775,98.448 D3.2@227.658,98.449 ; D3.2@227.658,98.449 D7.2@236.802,98.449
GPIO0: U1.10
HV: D8.1 R2.1 R3.1 R8.2 R9.1 R10.1 R11.1 R51.2 R52.1 R53.1 R54.1 R55.1 U38.2 U48.2 | length 194.5
  Top Layer w0.15: R8.2@88.715,90.521 92.883,90.521 95.451,93.089 106.373,93.089 110.564,88.898 110.564,80.389 112.723,78.23 R9.1@112.723,76.436 ; R9.1@112.723,76.436 115.374,76.436 115.66,76.722 R52.1@115.66,78.103 R53.1@115.66,80.389 ; v1(115.644,82.548) R53.1@115.66,80.389 ; R51.2@121.47,88.517 U38.2@124.407,88.51 ; v1(124.407,89.914) U38.2@124.407,88.51 ; D8.1@127.709,90.396 127.709,89.152 127.068,88.51 U38.2@124.407,88.51 ; v1(132.281,89.914) 133.932,89.914 137.234,93.216 148.41,93.216 149.695,91.93 R10.1@152.347,91.93 ; R10.1@152.347,91.93 R11.1@154.379,91.93 v1(154.379,93.47) ; v1(178.001,82.929) v1(183.843,82.929) ; R55.1@193.987,80.643 R54.1@193.987,82.929 v1(196.416,82.929) ; v1(216.101,92.218) R2.1@217.498,92.218 219.496,92.218 R3.1@219.53,92.184
  Top Layer w0.254: U48.2@219.237,95.725 219.237,93.572 219.53,93.279 R3.1@219.53,92.184
  Bottom Layer w0.15: v1(115.644,82.548) 118.438,82.548 119.073,83.183 119.073,88.517 120.47,89.914 v1(124.407,89.914) v1(132.281,89.914) ; v1(154.379,93.47) 175.08,93.47 178.001,90.549 v1(178.001,82.929) ; v1(183.843,82.929) v1(196.416,82.929) 198.448,82.929 199.718,84.199 199.718,90.168 202.258,92.708 208.862,92.708 209.352,92.218 v1(216.101,92.218)
HV_FB: C76.2 R50.2 R51.1 U37.5 | length 7.3
  Top Layer w0.15: U37.5@116.992,93.327 118.2,93.327 118.438,93.089 R50.2@119.504,93.089 119.504,91.896 119.59,91.81 C76.2@119.59,90.803 119.59,89.795 119.47,89.676 R51.1@119.47,88.517
LED-DIN: Q1.3 R4.1 U27.1 | length 128.3
  Top Layer w0.15: U27.1@76.316,81.27 76.316,80.219 v1(76.655,79.881) ; v1(128.979,80.262) 128.979,80.897 130.757,82.675 130.757,92.454 134.059,95.756 144.981,95.756 147.663,98.438 R4.1@170.889,98.438 ; R4.1@170.889,98.438 170.924,98.403 Q1.3@170.924,95.121
  Bottom Layer w0.15: v1(76.655,79.881) 76.656,77.975 77.291,77.34 77.291,71.689 79.005,69.974 110.438,69.974 115.01,74.546 127.964,74.546 128.98,75.562 v1(128.979,80.262)
N1_0: U2.2 U18.15 | length 9.7
  Top Layer w0.15: U2.2@83.456,77.525 83.514,77.468 85.164,77.468 87.566,75.066 U18.15@87.566,70.49
N1_1: U2.11 U17.11 | length 4.8
  Top Layer w0.15: U2.11@73.727,74.021 74.845,74.008 75.165,73.688 U17.11@75.165,70.49
N1_2: U2.10 U17.13 | length 8.1
  Top Layer w0.15: U2.10@71.976,77.525 72.051,77.45 72.051,73.246 73.067,72.23 73.575,72.23 73.867,71.938 U17.13@73.866,70.491
N1_3: U2.9 U17.12 | length 15.5
  Top Layer w0.15: U2.9@71.976,82.02 73.321,82.009 73.829,81.501 73.829,75.659 73.575,75.405 72.813,75.405 72.432,75.024 72.432,73.5 73.194,72.738 74.083,72.738 74.514,72.306 U17.12@74.514,70.49
N1_4: U2.8 U17.14 | length 17.6
  Top Layer w0.15: U2.8@71.976,86.516 71.924,86.464 71.924,84.295 70.781,83.152 70.781,81.12 70.654,80.993 70.654,76.167 71.67,75.151 71.67,72.992 73.216,71.445 U17.14@73.216,70.491
N1_5: U2.7 U17.16 | length 22.3
  Top Layer w0.15: v1(70.4,73.5) 70.4,72.992 71.916,71.476 U17.16@71.916,70.491
  Bottom Layer w0.15: v1(70.4,73.5) 70.4,74.516 70.654,74.77 70.654,78.453 71.416,79.215 72.686,79.215 73.702,80.231 73.702,89.995 U2.7@73.727,90.023
N1_6: U2.6 U17.15 | length 26.2
  Top Layer w0.15: v1(71.162,74.135) 71.162,72.865 72.566,71.461 U17.15@72.566,70.491
  Bottom Layer w0.15: v1(71.162,74.135) 71.162,75.532 71.416,75.786 73.448,75.786 74.337,76.675 74.337,86.962 75.353,87.978 77.385,87.978 77.766,88.359 77.766,90.963 U2.6@77.716,91.012
N1_7: U2.5 U17.17 | length 35.5
  Top Layer w0.15: v1(69.638,74.135) 69.638,72.992 71.266,71.364 U17.17@71.266,70.491
  Bottom Layer w0.15: v1(69.638,74.135) 69.638,74.897 70.146,75.405 70.146,82.517 70.654,83.025 70.654,90.137 73.321,92.804 81.322,92.804 81.703,92.423 U2.5@81.703,90.023
N1_8: U2.4 U17.18 | length 42.8
  Top Layer w0.15: v1(69.892,70.491) U17.18@70.616,70.491
  Bottom Layer w0.15: v1(69.892,70.491) 69.892,71.976 68.876,72.992 68.876,74.897 69.638,75.659 69.638,83.025 69.892,83.279 69.892,90.264 73.067,93.439 82.465,93.439 83.608,92.296 83.608,88.486 83.354,88.232 83.354,86.619 U2.4@83.455,86.517
N1_9: U2.3 U18.16 | length 16.1
  Top Layer w0.15: U2.3@83.456,82.02 81.735,80.299 81.735,76.325 82.497,75.563 85.418,75.563 86.916,74.065 U18.16@86.916,70.49
N2_0: U12.2 U19.16 | length 11.9
  Top Layer w0.15: U19.16@102.416,70.49 v1(102.416,72.134)
  Bottom Layer w0.15: v1(102.416,72.134) 102.416,75.415 104.595,77.595 108.387,77.595 U12.2@108.456,77.525
N2_1: U12.11 U18.14 | length 14.1
  Top Layer w0.15: U18.14@88.216,70.49 v1(88.216,74.039)
  Bottom Layer w0.15: v1(88.216,74.039) U12.11@98.728,74.019
N2_2: U12.10 U19.15 | length 11.8
  Top Layer w0.15: U12.10@96.976,77.525 97.033,77.468 99.007,77.468 100.531,75.944 100.531,73.404 101.039,72.896 102.817,72.896 103.066,72.647 U19.15@103.066,70.49
N2_3: U12.9 U18.12 | length 19
  Top Layer w0.15: U18.12@89.516,70.49 v1(89.516,82.04)
  Bottom Layer w0.15: v1@89.515,82.04 U12.9@96.976,82.02
N2_4: U12.8 U18.11 | length 19.9
  Top Layer w0.15: U18.11@90.166,70.49 90.166,81.58 95.07,86.485 96.944,86.485 U12.8@96.976,86.516
N2_5: U12.7 U19.18 | length 20.5
  Top Layer w0.15: U19.18@101.116,70.49 v1@101.116,72.134
  Bottom Layer w0.15: U12.7@98.728,90.021 98.754,87.754 98.881,87.627 98.881,77.912 101.116,75.677 v1(101.116,72.134)
N2_6: U12.6 U19.17 | length 23.1
  Top Layer w0.15: U19.17@101.766,70.49 v1(101.766,71.499)
  Bottom Layer w0.15: v1(101.766,71.499) 101.766,76.169 99.389,78.547 99.389,88.135 100.913,89.659 101.365,89.659 U12.6@102.716,91.011
N2_7: U12.5 U18.13 | length 36.7
  Top Layer w0.15: U18.13@88.865,70.49 88.865,85.232 96.213,92.581 104.146,92.581 U12.5@106.704,90.021
N2_8: U12.4 U19.14 | length 18.9
  Top Layer w0.15: U19.14@103.716,70.49 103.716,75.318 104.595,76.198 106.119,76.198 106.5,76.579 106.5,84.56 U12.4@108.456,86.516
N2_9: U12.3 U19.13 | length 14.1
  Top Layer w0.15: U19.13@104.366,70.49 104.366,75.333 104.926,75.893 106.45,75.893 106.881,76.325 106.881,80.445 U12.3@108.456,82.02
N3_0: U16.2 U20.18 | length 20.4
  Top Layer w0.15: U20.18@132.116,70.49 v1(132.116,72.388)
  Bottom Layer w0.15: v1(132.116,72.388) 134.44,72.388 137.742,75.69 144.981,75.69 146.759,77.468 148.399,77.468 U16.2@148.456,77.525
N3_1: U16.11 U19.11 | length 36.6
  Top Layer w0.15: U19.11@105.666,70.49 105.667,71.808 105.992,72.134 129.487,72.134 129.868,71.753 v1(130.884,71.753)
  Bottom Layer w0.15: v1(130.884,71.753) 138.123,71.753 138.758,72.388 138.758,73.989 U16.11@138.728,74.019
N3_2: U16.10 U20.16 | length 9
  Top Layer w0.15: U20.16@133.416,70.49 v1(133.416,73.277)
  Bottom Layer w0.15: v1(133.416,73.277) 134.313,73.277 136.975,75.938 U16.10@136.976,77.525